# EAGLE board SmartRock_EC V4 small 4.3.3 (EAGLE 9.6.2)
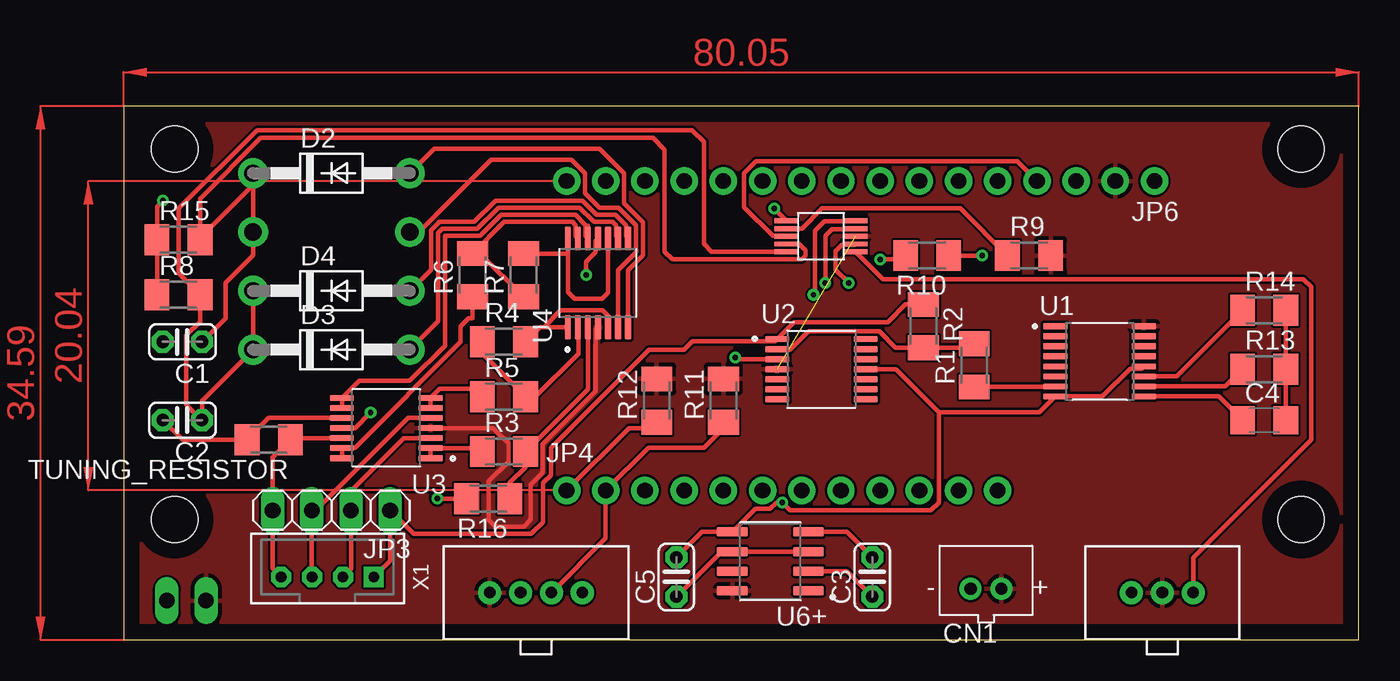
[diagram p0: board, top side]
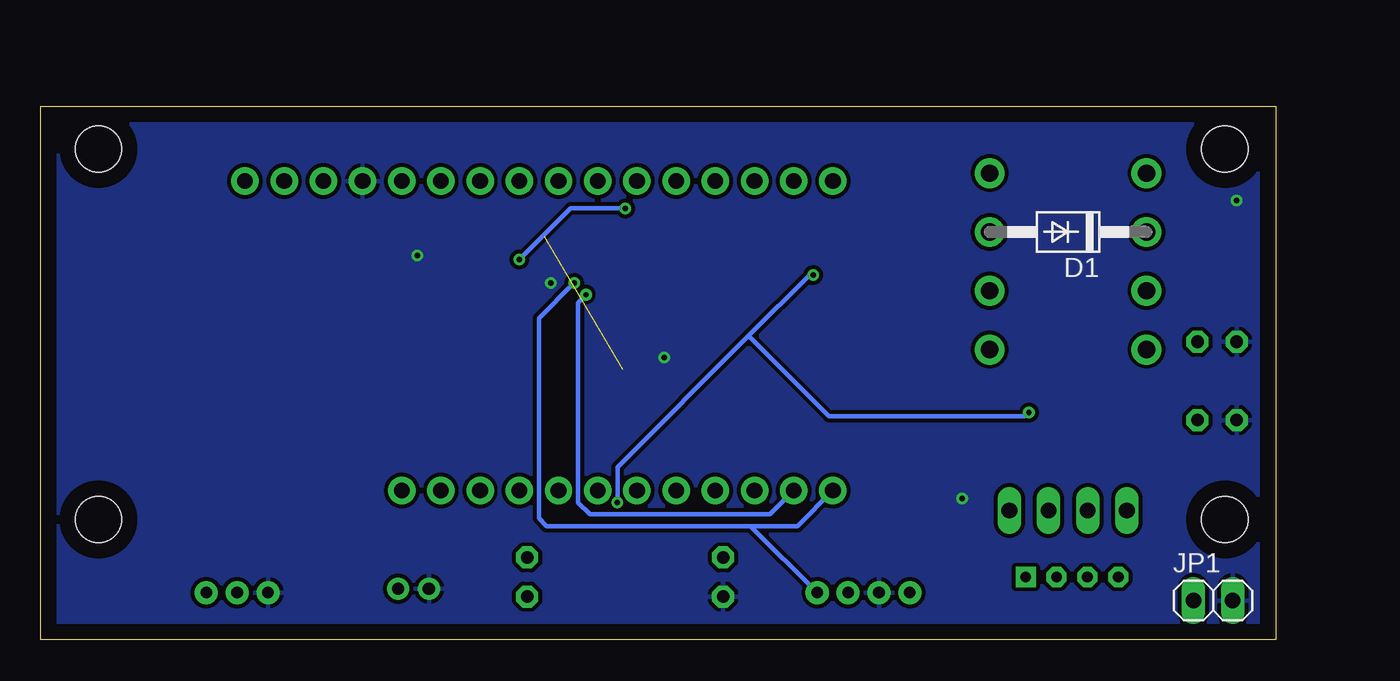
[diagram p1: board, bottom side, seen from below]

Size 80.05 x 34.57 mm. Coordinates in mm from the lower left corner, seen from the top.
Outline: 0,0 80.05,0 80.05,34.57 0,34.57 0,0
Copper layers (1*16): Top 0.035mm / dielectric 1.5mm / Bottom 0.035mm
Design rules "default": minimum track width 6mil, minimum drill 0.35mm, track to track 6mil, track to pad 6mil, pad to pad 6mil, via to via 6mil, smd to smd 6mil, copper to edge 40mil, drill to drill 6mil, minimum pad ring 10mil, minimum via ring 8mil, stop-mask expansion 4mil, vias tented up to drill 0mil, thermal gap 10mil
Net classes: 0 default: width 0.305 mm
Holes 3 mm at 3.3,31.79 3.3,7.79 76.3,31.79 76.3,7.79

## Footprints (pad centres in the part's own frame; a part is rotated, then mirrored left to right if it is on the bottom)
C025-024X044 = drill 0.813 pad 1.422 octagon: 1 -1.27,0; 2 1.27,0
C1206 = smd 1.6 x 1.8: 1 -1.4,0; 2 1.4,0
JST-PH-2-THM = drill 0.8 pad 1.422: 1 1,0; 2 -1,0
JST_3PIN_2MM = drill 0.75 pad 1.5: P$1 -2,0; P$2 0,0; P$3 2,0
JST_4PIN_2MM = drill 0.75 pad 1.5: P$1 0,0; P$2 -2,0; P$3 -4,0; P$4 -6,0
DO41-10 = drill 1.118 pad 1.93: A 5.08,0; C -5.08,0
1X02 = drill 1.016 long: 1 -1.27,0; 2 1.27,0
1X04 = drill 1.016 long: 1 -3.81,0; 2 -1.27,0; 3 1.27,0; 4 3.81,0
1X12-CB = drill 1.016 pad 1.778: 1 -13.97,0; 2 -11.43,0; 3 -8.89,0; 4 -6.35,0; 5 -3.81,0; 6 -1.27,0; 7 1.27,0; 8 3.81,0; 9 6.35,0; 10 8.89,0; 11 11.43,0; 12 13.97,0
1X15-CB = drill 1.016 pad 1.778: 1 -17.78,0; 2 -15.24,0; 3 -12.7,0; 4 -10.16,0; 5 -7.62,0; 6 -5.08,0; 7 -2.54,0; 8 0,0; 9 2.54,0; 10 5.08,0; 11 7.62,0; 12 10.16,0; 13 12.7,0; 14 15.24,0; 15 17.78,0
1X01-CLEANBIG = drill 1.016 pad 1.778: 1 0,0
M1206 = smd 1.6 x 2: 1 -1.4,0; 2 1.4,0
CD4060BPWR = smd 1.57 x 0.41: 1 -2.87,2.275; 2 -2.87,1.625; 3 -2.87,0.975; 4 -2.87,0.325; 5 -2.87,-0.325; 6 -2.87,-0.975; 7 -2.87,-1.625; 8 -2.87,-2.275; 9 2.87,-2.275; 10 2.87,-1.625; 11 2.87,-0.975; 12 2.87,-0.325; 13 2.87,0.325; 14 2.87,0.975; 15 2.87,1.625; 16 2.87,2.275
LT074CPWR = smd 1.57 x 0.41: 1 -2.87,1.95; 2 -2.87,1.3; 3 -2.87,0.65; 4 -2.87,0; 5 -2.87,-0.65; 6 -2.87,-1.3; 7 -2.87,-1.95; 8 2.87,-1.95; 9 2.87,-1.3; 10 2.87,-0.65; 11 2.87,0; 12 2.87,0.65; 13 2.87,1.3; 14 2.87,1.95
ADS1115 = smd 1.5 x 0.318: ADDR -0.75,2.5; AIN0 -0.75,1; AIN1 -0.75,0.5; AIN2 3.75,0.5; AIN3 3.75,1; ALERT/RDY -0.75,2; GND -0.75,1.5; SCL 3.75,2.5; SDA 3.75,2; VDD 3.75,1.5
MAX660MX/NOPB = smd 1.97 x 0.6: 1 -2.47,1.905; 2 -2.47,0.635; 3 -2.47,-0.635; 4 -2.47,-1.905; 5 2.47,-1.905; 6 2.47,-0.635; 7 2.47,0.635; 8 2.47,1.905
B4B-PH-K-S = drill 0.7 pad 1.3 square: 1 3,0 | drill 0.7 pad 1.3 octagon: 2 1,0; 3 -1,0; 4 -3,0

## Placement (x,y rotation side)
C1  1uF  [C025-024X044]  3.81,19.31 180 top
C2  1uF  [C025-024X044]  3.81,14.23 180 top
C3  1uF  [C025-024X044]  48.51,4.07 90 top
C4  1nF  [C1206]  73.91,14.23 0 top
C5  1uF  [C025-024X044]  35.81,4.07 90 top
CN1  [JST-PH-2-THM]  55.88,3.3 0 top
CN2  JST_3PIN_2MM  [JST_3PIN_2MM]  67.31,3.05 0 top
CN5  JST_4PIN_2MM  [JST_4PIN_2MM]  29.72,3.05 0 top
D1  1N4004  [DO41-10]  13.46,26.42 180 bottom
D2  1N4004  [DO41-10]  13.46,30.23 0 top
D3  1N4004  [DO41-10]  13.46,18.8 0 top
D4  1N4004  [DO41-10]  13.46,22.61 0 top
JP1  [1X02]  4.06,2.54 0 bottom
JP3  [1X04]  13.46,8.38 180 top
JP4  [1X12-CB]  42.67,9.68 0 top
JP5  [1X15-CB]  46.48,29.72 180 top
JP6  [1X01-CLEANBIG]  66.8,29.72 180 top
R1  4.7k  [M1206]  55.12,17.78 90 top
R2  1k  [M1206]  51.82,20.32 270 top
R3  1k  [M1206]  24.64,12.19 0 top
R4  3.3k  [M1206]  24.64,19.31 0 top
R5  1k  [M1206]  24.64,15.75 0 top
R6  1k  [M1206]  22.61,23.62 90 top
R7  12k  [M1206]  25.91,23.62 90 top
R8  1M  [M1206]  3.56,22.35 0 top
R9  10k  [M1206]  58.67,24.89 0 top
R10  10k  [M1206]  52.07,24.89 180 top
R11  10k  [M1206]  38.86,15.5 90 top
R12  10k  [M1206]  34.54,15.5 90 top
R13  10k  [M1206]  73.91,17.53 0 top
R14  100k  [M1206]  73.91,21.34 0 top
R15  1M  [M1206]  3.56,25.91 0 top
R16  3.3k  [M1206]  23.62,9.15 180 top
TUNING_RESISTOR  200  [M1206]  9.4,12.96 180 top
U1  CD4060BPWR  [CD4060BPWR]  63.25,18.04 0 top
U2  TL074CPWR  [LT074CPWR]  45.21,17.53 0 top
U3  TL074CPWR  [LT074CPWR]  17.02,13.72 180 top
U4  TL074CPWR  [LT074CPWR]  30.73,23.12 90 top
U5  ADS1115  [ADS1115]  43.69,24.64 0 top
U6+  MAX660MX/NOPB  [MAX660MX/NOPB]  41.91,5.08 180 top
X1  B4B-PH-K-S  [B4B-PH-K-S]  13.21,4.07 0 top

## Library data of the parts
C1-C5 CN1 D1-D4 JP4-JP6 R1-R16 TUNING_RESISTOR = adafruit
CN2 CN5 = JSTconnector
JP1 JP3 = pinhead
U1-U4 U6+ = PNNL_Wenner
U5 = my_lib
X1 = 2_pin_JST

## Nets
!RESET: JP6.1
-VCC: C5.2 U1.8 U1.12 U2.11 U3.11 U4.11 U6+.5
A: R1.1 U1.7
AIN2: CN2.P$3 U5.AIN2
AREF: JP5.2
B: JP3.4 TUNING_RESISTOR.1 U3.12 X1.4
CAP1: C1.1 D1.C D2.C R15.2 U5.AIN0
CAP2: C2.1 D3.C D4.C R8.2 U5.AIN1
EN: JP4.11
GND: C1.2 C2.2 C5.1 CN1.2 CN2.P$1 CN5.P$3 JP1.2 JP5.3 R8.1 R10.1 R15.1 R16.2 TUNING_RESISTOR.2 U2.3 U3.10 U5.AIN3 U5.GND U6+.3 U6+.6
GPIO5: JP4.3
GPIO6: JP4.4
GPIO9: JP4.5
GPIO10: JP4.6
GPIO11: JP4.7
GPIO13: JP4.9
GPIOA0: JP5.4
GPIOA1: JP5.5
GPIOA2: JP5.6
GPIOA3: JP5.7
GPIOA4: JP5.8
GPIOA5: JP5.9
GPIOMOSI: JP5.11
GPIORX: JP5.13
GPIOSCK: JP5.10
GPIOTX: JP5.14
GPSIOMISO: JP5.12
M: JP3.2 U3.3 X1.2
N: JP3.3 U3.5 X1.3
N$1: R3.2 R16.1 U4.3
N$2: R4.1 R5.2 U4.2
N$3: R1.2 R2.2 U2.2
N$4: D1.A U4.6
N$5: R6.2 R7.1 U4.13
N$6: D3.A U4.9
N$7: C3.1 U6+.2
N$8: C3.2 U6+.4
N$10: C4.1 U1.9
N$11: R13.1 U1.10
N$12: R14.1 U1.11
N$13: R10.2 U5.ADDR
N$15: R9.1 U5.ALERT/RDY
N$17: C4.2 R13.2 R14.2
NC: JP5.15
OUT1: R3.1 U3.1 U3.2
OUT1B: R4.2 U4.1 U4.5
OUT2: R5.1 U3.6 U3.7
OUT2B: D2.A U4.7
OUT3: U3.8 U3.9 U4.12
OUT3B: D4.A U4.8
OUT4: R6.1 U3.13 U3.14
OUT4B: R7.2 U4.10 U4.14
SCALE_A: JP3.1 R2.1 U2.1 X1.1
SCL: CN5.P$2 JP4.2 R11.1 U5.SCL
SDA: CN5.P$1 JP4.1 R12.1 U5.SDA
USB: JP4.10
VBAT: JP4.12
VCC: CN1.1 CN2.P$2 CN5.P$4 JP1.1 JP5.1 R9.2 R11.2 R12.2 U1.16 U2.4 U3.4 U4.4 U5.VDD U6+.8

## Tracks (layer width: path | path; a pad name or v marks a point on that pad's centre or on a via)
-VCC  (via drill 0.35)
  Top 0.305: U6+.5 37.47,6.99 C5.2 | U2.11 50.04,17.53 52.83,14.73 | 52.83,14.73 59.35,14.73 U1.8 63.43,15.76 65.24,17.57 65.98,17.57 U1.12 | 39.69,6.99 U6+.5 | 52.83,14.73 52.83,8.89 52.32,8.38 43.18,8.38 v42.67,8.89 42.3,8.89 41.9,8.49 40.94,8.49 U6+.5 | U4.11 30.59,25.85 30.59,25.1 29.97,24.48 v29.97,23.62 | U3.11 14.99,13.72 v16,14.73
  Bottom 0.305: v29.97,23.62 30.23,23.62 34.16,19.69 | v16,14.73 16.26,14.48 28.96,14.48 34.16,19.69 | v42.67,8.89 42.67,11.18 34.16,19.69
A
  Top 0.305: U1.7 60.35,16.38 R1.1
AIN2
  Top 0.305: CN2.P$3 69.31,5.3 76.96,12.96 76.96,22.86 76.45,23.37 49.21,23.37 U5.AIN2
B
  Top 0.305: X1.4 9.65,4.62 JP3.4 9.65,11.81 TUNING_RESISTOR.1 10.91,13.07 U3.12
CAP1
  Top 0.305: R15.2 4.57,25.53 | C1.1 6.6,20.83 6.6,23.13 8.38,24.91 D1.C D2.C 8.38,29.47 4.96,26.04 R15.2 | R15.2 4.96,28.58 8.89,32.51 34.29,32.51 35.05,31.75 35.05,25.15 35.56,24.64 43.94,24.64 44.2,24.89 44.2,25.22 43.78,25.64 U5.AIN0
CAP2
  Top 0.305: R8.2 5.08,22.23 | R8.2 4.96,20.62 4.06,19.73 4.06,15.24 C2.1 5.08,15.5 D3.C D4.C | R8.2 3.56,23.75 3.56,27.94 8.64,33.02 36.83,33.02 37.59,32.26 37.59,25.65 38.1,25.14 U5.AIN1
GND  (via drill 0.35)
  Top 0.305: R8.1 R15.1 2.16,28.07 v2.54,28.45 | C2.2 3.81,12.96 TUNING_RESISTOR.2 9.41,14.37 U3.10 | C5.1 38.74,5.72 U6+.6 U6+.3 | U2.3 39.74,18.18 v39.62,18.29 | R10.1 v55.63,24.89 | U5.AIN3 47.4,25.6 46.56,25.6 46.13,25.17 46.13,23.98 v46.99,23.12 | U5.GND 42.9,26.18 42.06,26.18 40.21,28.03 40.21,30.21 40.98,30.99 57.91,30.99 JP5.3 | R16.2 v20.32,9.15
  pour Bottom (isolate 0.254): 0,34.48 80,34.48 80,-0.02 0,-0.02
M
  Top 0.305: X1.2 14.73,4.59 JP3.2 | JP3.2 14.73,8.64 | JP3.2 14.73,9.65 18.15,13.07 U3.3
N
  Top 0.305: X1.3 12.19,4.08 JP3.3 12.45,8.38 18.43,14.37 U3.5
N$1
  Top 0.305: U4.3 30.08,16.24 R3.2 26.04,11.18 25.02,10.16 R16.1
N$2
  Top 0.305: U4.2 29.46,20.22 29.46,18.54 26.67,15.75 R5.2 23.24,18.55 R4.1
N$3
  Top 0.305: R1.2 54.86,18.92 R2.2 50.03,18.92 48.96,19.99 44.37,19.99 43.18,18.8 42.37,18.8 U2.2
N$4
  Top 0.305: D1.A 19.14,26.42 23.82,31.09 29.02,31.09 29.9,30.21 29.9,28.94 30.85,27.99 32.07,27.99 33.19,26.87 33.19,25.1 32.03,23.94 U4.6
N$5
  Top 0.305: 29.46,25.96 U4.13 29.29,26.13 29.29,26.87 29.09,27.08 24.66,27.08 R6.2 | R6.2 23.11,25.02 R7.1 | 22.61,25.66 R6.2
N$6
  Top 0.305: D3.A 20.37,20.63 20.37,26.35 20.64,26.62 22.91,26.62 24.28,27.99 29.55,27.99 30.47,27.08 31.69,27.08 31.89,26.87 31.89,26.13 U4.9
N$7
  Top 0.305: C3.1 46.86,4.45 U6+.2
N$8
  Top 0.305: C3.2 46.86,6.99 U6+.4
N$10
  Top 0.305: U1.9 70.98,15.76 C4.1
N$11
  Top 0.305: U1.10 71.4,16.41 R13.1
N$12
  Top 0.305: U1.11 68.24,17.06 R14.1
N$13  (via drill 0.35)
  Top 0.305: U5.ADDR 42.16,27.91 v42.16,27.94 | R10.2 50.42,24.64 v49.02,24.64
  Bottom 0.305: v42.16,27.94 45.72,27.94 v49.02,24.64
N$15
  Top 0.305: U5.ALERT/RDY 43.95,26.64 45.26,27.95 54.22,27.95 R9.1
N$17
  Top 0.305: R14.2 R13.2 C4.2
OUT1
  Top 0.305: U3.1 U3.2 23.01,12.42 R3.1
OUT1B
  Top 0.305: R4.2 26.98,20.25 27.23,20.25 | 27.23,20.25 U4.1 | 27.23,20.25 28.32,21.34 31.03,21.34 31.38,20.99 U4.5
OUT2
  Top 0.305: U3.6 U3.7 20.48,16.26 22.73,16.26 R5.1
OUT2B
  Top 0.305: D2.A 20.12,31.8 30.85,31.8 32.44,30.21 32.44,28.27 33.65,27.06 33.65,24.91 32.68,23.95 U4.7
OUT3
  Top 0.305: U3.9 U3.8 15.25,16.77 18.54,16.77 20.83,19.05 20.83,26.16 23.1,26.16 24.47,27.53 29.28,27.53 29.94,26.87 29.94,26.13 U4.12 30.08,26.81
OUT3B
  Top 0.305: D4.A 19.91,23.98 19.91,26.54 20.44,27.06 20.45,27.08 22.72,27.08 24.09,28.45 29.74,28.45 30.66,27.53 30.67,27.53 30.73,27.53 31.88,27.53 32.54,26.87 32.54,26.13 U4.8
OUT4
  Top 0.305: U3.14 U3.13 14.18,12.45 14.99,12.45 21.84,19.31 21.84,20.32 22.35,20.83 22.61,20.83 R6.1
OUT4B
  Top 0.305: R7.2 28.74,25.02 28.78,24.98 | U4.14 28.78,24.98 | 28.78,24.98 28.78,22.53 29.21,22.1 30.99,22.1 31.38,22.5 U4.10
SCALE_A
  Top 0.305: X1.1 17.27,5.13 JP3.1 18.8,6.86 26.42,6.86 27.18,7.62 27.18,10.16 27.69,10.67 27.69,12.45 34.04,18.8 36.32,18.8 36.86,19.34 42.2,19.34 U2.1 43.43,20.58 49.53,20.58 50.68,21.72 R2.1
SCL  (via drill 0.35)
  Top 0.305: v44.7,22.35 44.78,22.43 44.78,26.49 45.4,27.1 47.4,27.1 U5.SCL | CN5.P$2 31.24,6.57 JP4.2 34.01,12.45 37.59,12.45 38.86,13.72 R11.1
  Bottom 0.305: JP4.2 32.79,8.13 44.45,8.13 45.21,8.89 45.21,21.85 v44.7,22.35
SDA  (via drill 0.35)
  Top 0.305: U5.SDA 47.4,26.6 45.91,26.6 45.47,26.16 v45.47,23.12 | R12.1 34.17,13.72 32.74,13.72 JP4.1
  Bottom 0.305: JP4.1 31.01,7.37 34.04,7.37 | 34.04,7.37 47.24,7.37 47.75,7.88 47.75,20.83 v45.47,23.12 | CN5.P$1 34.04,7.37
VCC  (1 unrouted)
  Top 0.305: U4.4 30.59,20.11 30.59,16.1 27.14,12.65 27.14,10.81 26.38,10.05 26.38,7.77 25.95,7.33 24.1,7.33 23.66,7.77 23.66,10.27 24.93,11.54 24.93,12.73 23.95,13.72 U3.4
  pour Top (isolate 0.152): 0,34.48 80,34.48 80,-0.02 0,-0.02
(copper drawn outside any net)
  shapes: Top area x3